# Altium PCB master-schematic-gs.PcbDoc
Units mil, origin at the board's own origin, x right, y up, seen from the top; angles counter-clockwise.
Board outline 5050 x 4775 mil, 2 copper layers (Top Layer, Bottom Layer); 27 components, 82 nets, 268 pads, 13 vias.
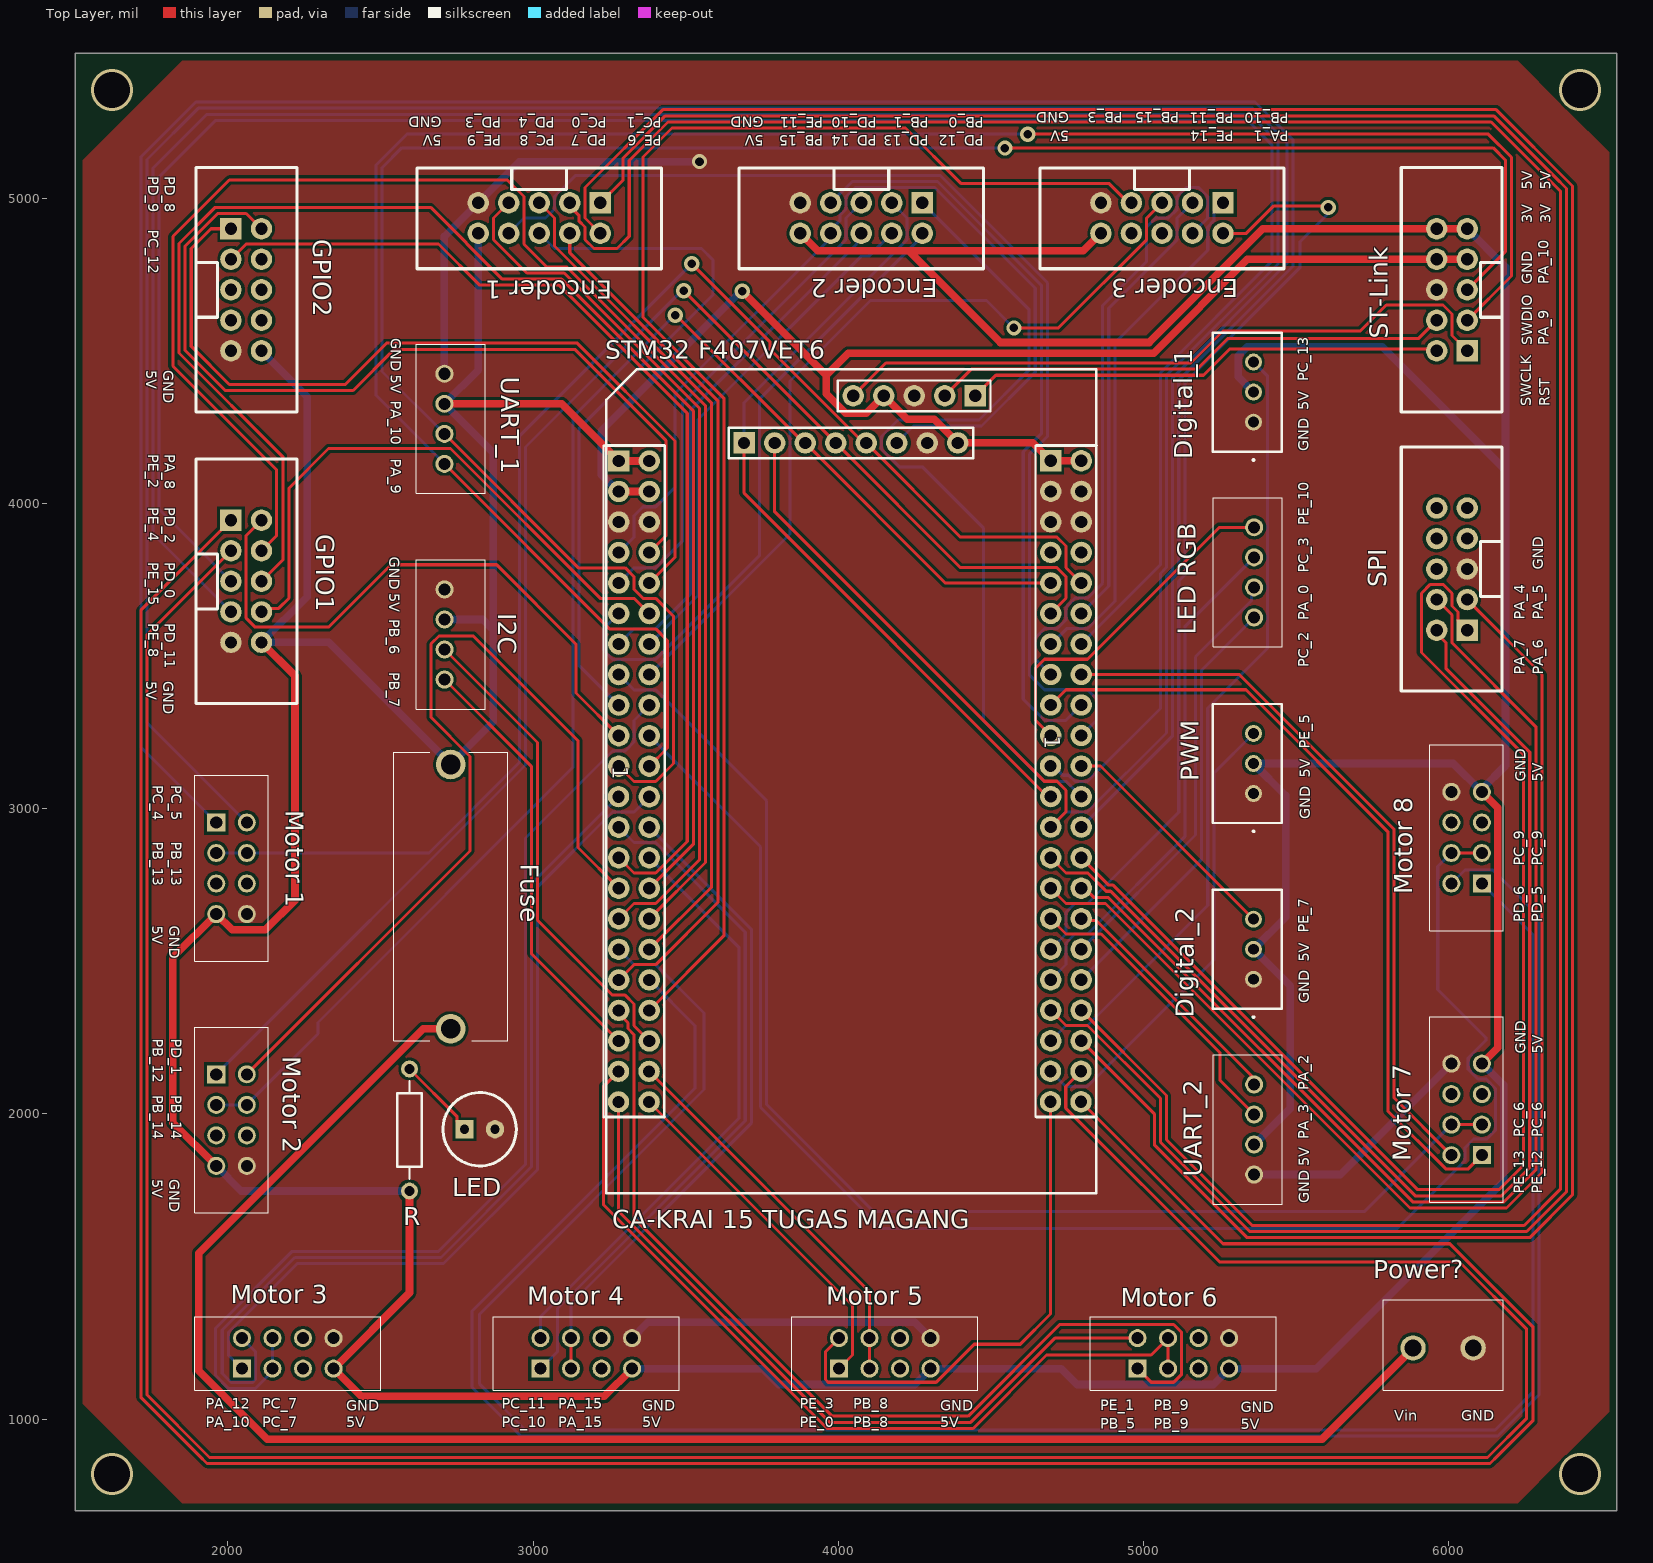
[diagram p0: Top Layer view]
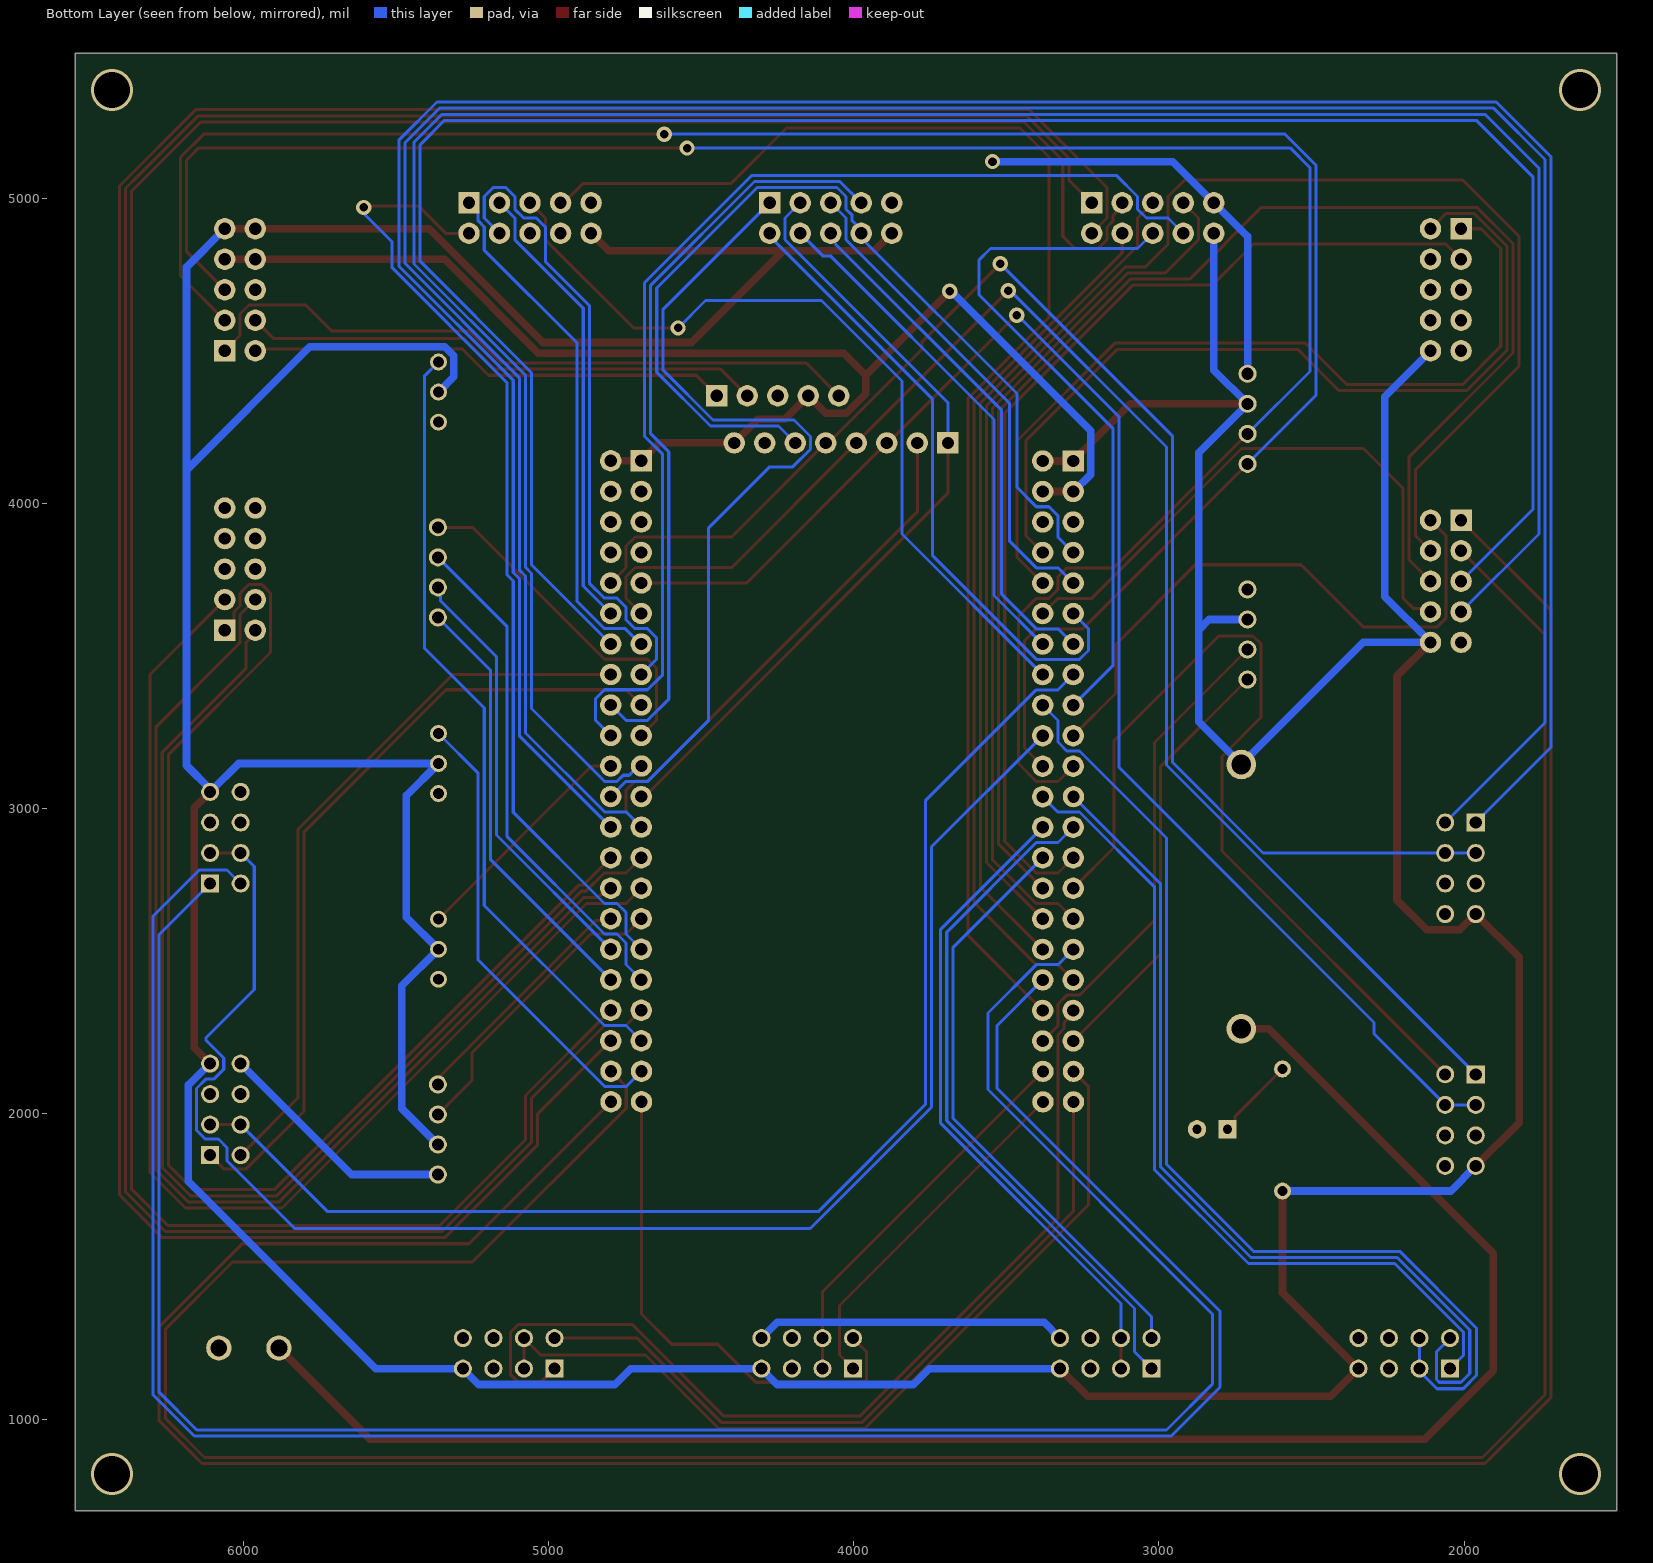
[diagram p1: Bottom Layer view, seen from below]

## Layer stack, top to bottom
Top Solder: solder mask 0.4, Solder Resist, Dk 3.5
Top Layer: signal copper 1.4
Dielectric 1: dielectric 12.6, FR-4, Dk 4.8
Bottom Layer: signal copper 1.4
Bottom Solder: solder mask 0.4, Solder Resist, Dk 3.5

## Board outline
1500,700 6550,700 6550,5475 1500,5475

## Design rules (kind name [scope] priority, off if disabled: settings)
Clearance [All] p1: gap=10 ignorepadtopadclearanceinfootprint=FALSE except(0: Arc-Hole Track-Hole SMDPad-Hole THPad-Hole Via-Hole Fill-Hole Poly-Hole Region-Hole Text-Hole)
PolygonConnect [All] p1: connectstyle=Direct reliefconductorwidth=10 reliefentries=4 polygonreliefangle="90 Angle" airgapwidth=10
RoutingVias [All] p1: holewidth=28 width=50 viastyle="Through Hole" minholewidth=28 minwidth=50 maxholewidth=28 maxwidth=50
SolderMaskExpansion [All] p1: expansion=4 istentingtop=FALSE
Width Width_2 [InNet('3V')] p1: maxlimit=30 minlimit=20 preferedwidth=25 minimp=50.000000 maximp=50.000000 favimp=50.000000
Width Width_3 [InNet('Fuse')] p2: maxlimit=30 minlimit=20 preferedwidth=25 minimp=50.000000 maximp=50.000000 favimp=50.000000
Width Width_1 [InNet('GND')] p3: maxlimit=30 minlimit=20 preferedwidth=25 minimp=50.000000 maximp=50.000000 favimp=50.000000
Width [InNet('5V')] p4: maxlimit=30 minlimit=20 preferedwidth=25 minimp=50.000000 maximp=50.000000 favimp=50.000000
30 further rules are at their usual default settings.

## Components (designator, comment, footprint, x,y, rotation, side; value= is the part's Value field where it differs from the comment)
Digital_1 "B3B-XH-A_LF__SN_" B3BXHALFSN 5360,4266.57 r90 top (schematic designator Interrupt)
Digital_2 "B3B-XH-A_LF__SN_" B3BXHALFSN 5360,2441.45 r90 top (schematic designator Infrared)
"Encoder 1" "Header ISP" "Header ISP" 3120,5085 r180 top
"Encoder 2" "Header ISP" "Header ISP" 4175,5085 r180 top
"Encoder 3" "Header ISP" "Header ISP" 5160,5085 r180 top
Fuse "C3131" C3131 2730,3145 r270 top (schematic designator Fuse?)
GPIO1 "Header ISP" "Header ISP" 1910,3845 r270 top (schematic designator "Digital 1")
GPIO2 "Header ISP" "Header ISP" 1910,4800.07 r270 top (schematic designator "Digital 2")
I2C "B4B-XH-A_LF__SN_" B4BXHALFSN 2710,3718.43 r270 top
LED "LED 5mm" "LED 5mm" 2825,1950 r0 top (schematic designator led?)
"LED RGB" "B4B-XH-A_LF__SN_" B4BXHALFSN 5361.97,3626.7 r90 top
"Motor 1" "09181089622" 09181089622 1961.98,2955 r270 top
"Motor 2" "09181089622" 09181089622 1961.98,2130 r270 top
"Motor 3" "09181089622" 09181089622 2046.23,1165.75 r0 top
"Motor 4" "09181089622" 09181089622 3024.15,1165.75 r0 top
"Motor 5" "09181089622" 09181089622 4002.08,1165.75 r0 top
"Motor 6" "09181089622" 09181089622 4980,1165.75 r0 top
"Motor 7" "09181089622" 09181089622 6108.02,1865 r90 top
"Motor 8" "09181089622" 09181089622 6108.02,2755 r90 top
Power? "KF301-2P" KF3012P 5882.82,1233.46 r0 top
PWM "B3B-XH-A_LF__SN_" B3BXHALFSN 5360,3049.82 r90 top (schematic designator Servo)
R "Resistor 0.25W" "Resistor 0.25W" 2595,1947.53 r90 top (schematic designator R?)
SPI "Header ISP" "Header ISP" 6160,3685 r90 top
ST-Link "Header ISP" "Header ISP" 6160,4600.07 r90 top
"STM32 F407VET6" "STM32F407VET6" MICON 4040,3090 r0 top (schematic designator *)
UART_1 "B4B-XH-A_LF__SN_" B4BXHALFSN 2709.49,4425 r270 top
UART_2 "B4B-XH-A_LF__SN_" B4BXHALFSN 5361.97,1801.57 r90 top

## Footprints (in the part's own frame and the unit in brackets; to place one, negate y for a bottom-side part, rotate by r counter-clockwise, add the part's x,y. Pads: shape width x height; smd on the part's side, far side on the other; paste and mask are expansions set on the pad)
09181089622 [mm]
  rect 1.5x1.5 hole 1: 1(0,0)
  round 1.5 hole 1: 2(0,2.54) 3(2.54,0) 4(2.54,2.54) 5(5.08,0) 6(5.08,2.54) 7(7.62,0) 8(7.62,2.54)
  silkscreen extent -3.92,-1.78 11.54,4.32, body extent -3.92,-1.73 11.54,4.27, height 5.25
B3BXHALFSN [mm]
  round 1.4 hole 0.9: 1(0,0) 2(2.5,0) 3(5,0)
  silkscreen extent -3.2,-2.35 7.45,3.4, body extent -2.45,-2.35 7.45,3.4, height 7.09
B4BXHALFSN [mm]
  round 1.5 hole 1: 1(0,0) 2(2.5,0) 3(5,0) 4(7.5,0)
  silkscreen extent -2.45,-2.35 9.95,3.4, body extent -2.45,-2.35 9.95,3.4, height 7.52
C3131 [mm]
  round 2.46 hole 1.64: 1(0,0) 2(22,0)
  silkscreen extent -1,-4.75 23,4.75, body extent -1,-4.75 23,4.75, height 10.6
"Header ISP" [mil]
  rect 70x70 hole 40: 1(-100,100)
  round 70 hole 40: 2(-100,200) 3(0,100) 4(0,200) 5(100,100) 6(100,200) 7(200,100) 8(200,200) 9(300,100) 10(300,200)
  silkscreen extent -300,-14 500,316, body extent -300,-20 501,334, height 365
KF3012P [mm]
  round 2.1 hole 1.4: 1(0,0) 2(5,0)
  silkscreen extent -2.5,-3.5 7.5,4, body extent -2.99,-3.35 7.51,4.15, height 10
"LED 5mm" [mil]
  rect 60x60 hole 30: 1(-50,0)
  round 60 hole 30: 2(50,0)
  silkscreen extent -120,-120 120,120, body extent -117,-118 96,118, height 268
MICON [mil] "STM32F407VET6"
  round 70 hole 40: 3V3(-759.34,949.33) 3V3(-659.34,949.33) 3V3(108.46,1262.79) 3V3(351.3,1108.52) 3V3(755.69,1049.72) 5V(-659.34,1049.33) BOOT0(8.46,1262.79) GND(-759.34,849.33) GND(-659.34,849.33) GND(208.46,1262.79) GND(251.3,1108.52) GND(655.69,849.72) GND(655.69,949.72) GND(755.69,849.72) GND(755.69,949.72) PA0(755.69,-550.28) PA1(655.69,-550.28) PA2(755.69,-450.28) PA3(655.69,-450.28) PA4(755.69,-350.28) PA5(655.69,-350.28) PA6(755.69,-250.28) PA7(655.69,-250.28) PA8(-759.34,149.33) PA9(-659.34,49.33) PA10(-759.34,49.33) PA11(-659.34,-50.67) PA12(-760.12,-50.39) PA15(-659.34,-150.67) PB0(755.69,-50.28) PB1(655.69,-50.28) PB3(-659.34,-750.67) PB5(-759.34,-750.67) PB6(-659.34,-850.67) PB7(-759.34,-850.67) PB8(-660.12,-950.39) PB9(-760.12,-950.39) PB10(655.69,449.72) PB11(755.69,549.72) PB12(-48.7,1108.52) PB12(655.69,549.72) PB13(51.3,1108.52) PB13(755.69,649.72) PB14(-148.7,1108.52) PB14(655.69,649.72) PB15(-759.33,749.33) PB15(151.3,1108.52) PC0(755.69,-750.28) PC1(655.69,-750.28) PC2(755.69,-650.28) PC3(655.69,-650.28) PC4(755.69,-150.28) PC5(-248.7,1108.52) PC5(655.69,-150.28) PC6(-759.34,349.33) PC7(-659.34,249.33) PC8(-759.34,249.33) PC9(-659.34,149.33) PC10(-759.34,-150.67) PC11(-659.34,-250.67) PC12(-759.34,-250.67) PC13(655.69,-850.28) PD0(-659.34,-350.67) PD1(-759.34,-350.67) PD2(-659.34,-450.67) PD3(-759.34,-450.67) PD4(-659.34,-550.67) PD5(-759.34,-550.67) PD6(-659.34,-650.67) PD7(-759.34,-650.67) PD8(-659.33,749.33) PD9(-659.34,649.33) PD10(-759.34,649.33) PD11(-659.34,549.33) PD12(-759.34,549.33) PD13(-659.34,449.33) PD14(-759.34,449.33) PD15(-659.34,349.33) PE0(-660.12,-1050.39) PE1(-760.12,-1050.39) PE2(754.92,-1050) PE3(654.92,-1050) PE4(754.92,-950) PE5(654.92,-950) PE6(755.69,-850.28) PE7(755.69,49.72) PE8(654.92,50) PE9(755.69,149.72) PE10(655.69,149.72) PE11(755.69,249.72) PE12(655.69,249.72) PE13(755.69,349.72) PE14(655.69,349.72) PE15(755.69,449.72) SWDIO(308.46,1262.79) VDD(655.69,749.72) VREF(755.69,749.72)
  rect 70x70 hole 40: 3V3(655.69,1049.72) 5V(-759.34,1049.33) PB1(-348.7,1108.52) SWCLK(408.46,1262.79)
  silkscreen extent -809,-1350 806,1350, body extent -810,-1100 806,1313, height 327
"Resistor 0.25W" [mm]
  round 1.4 hole 0.85: 1(-5.08,0) 2(5.08,0)
  silkscreen extent -4.06,-1.02 4.06,1.02, body extent -5.35,-1.27 5.35,1.33, height 2.7

## Part data
Digital_1 Digital_2: "Connector", Arrow Part Number=B3B-XH-A(LF)(SN), Manufacturer_Name="JST (JAPAN SOLDERLESS TERMINALS)", Arrow Price/Stock=https://www.arrow.com/en/products/b3b-xh-a-lf-sn/jst-manufacturing?region=europe, Datasheet Link=https://datasheet.lcsc.com/szlcsc/1812131720_JST-Sales-America-B3B-XH-A-LF-SN_C144394.pdf, Height=7mm, Manufacturer_Part_Number=B3B-XH-A(LF)(SN)
"Encoder 1" "Encoder 3" GPIO1 GPIO2: "Encoder Posisi X"
"Encoder 2": "Encoder Posisi Y"
Fuse: "Undefined or Miscellaneous", Manufacturer_Name="Xucheng Elec", Datasheet Link=https://datasheet.lcsc.com/szlcsc/XC-Elec-Shenzhen-5x20-BLX-Fuse-holder_C3131.pdf, Height=10.5mm, Manufacturer_Part_Number=C3131
I2C: "TF Mini", Manufacturer_Name="JST (JAPAN SOLDERLESS TERMINALS)", Manufacturer_Part_Number=B4B-XH-A(LF)(SN), Datasheet Link=http://uk.rs-online.com/web/p/products/8201551, Height=7mm
"LED RGB": "Led Strip", Manufacturer_Name="JST (JAPAN SOLDERLESS TERMINALS)", Manufacturer_Part_Number=B4B-XH-A(LF)(SN), Datasheet Link=http://uk.rs-online.com/web/p/products/8201551, Height=7mm
"Motor 1" "Motor 2" "Motor 3" "Motor 4" "Motor 5" "Motor 6" "Motor 7" "Motor 8": "Connector", Manufacturer_Name=HARTING, Mouser Part Number=617-09181089622, Datasheet Link=http://uk.rs-online.com/web/p/products/6935182, Height=5.5mm, Manufacturer_Part_Number=09181089622, Mouser Price/Stock=https://www.mouser.co.uk/ProductDetail/HARTING/09181089622?qs=FeiuqfHlVTv2CjJEejdN9Q%3D%3D
Power?: "Connector", Manufacturer_Name="Handson Technology", Datasheet Link=http://www.handsontec.com/dataspecs/terminal%20block-5mm.pdf, Height=10mm, Manufacturer_Part_Number=KF301-2P
PWM: "Servo pin", Arrow Part Number=B3B-XH-A(LF)(SN), Manufacturer_Name="JST (JAPAN SOLDERLESS TERMINALS)", Arrow Price/Stock=https://www.arrow.com/en/products/b3b-xh-a-lf-sn/jst-manufacturing?region=europe, Datasheet Link=https://datasheet.lcsc.com/szlcsc/1812131720_JST-Sales-America-B3B-XH-A-LF-SN_C144394.pdf, Height=7mm, Manufacturer_Part_Number=B3B-XH-A(LF)(SN)
ST-Link: "ST-Link Port"
"STM32 F407VET6": library part Micon?
UART_1 UART_2: "ESP32", Manufacturer_Name="JST (JAPAN SOLDERLESS TERMINALS)", Manufacturer_Part_Number=B4B-XH-A(LF)(SN), Datasheet Link=http://uk.rs-online.com/web/p/products/8201551, Height=7mm

## Via types
v1: diameter 50, hole 28, Top Layer to Bottom Layer, 9 vias
v2: diameter 137.79, hole 118.11, Top Layer to Bottom Layer, 4 vias

## Nets (pads, with @x,y where several pads share a name; then routed paths per layer and width w, separated by ;. In a path a pad name is that pad's centre, name@x,y a point inside that pad or via, vN(x,y) a via of type N, cw(c..) or ccw(c..) an arc to the next point about the centre after c; other vN are vias at no path point)
3V: "STM32 F407VET6.3V3" ST-Link.7 ST-Link.8 | length 4643.7
  Top Layer w25: 3280.66,4039.33 3380.66,4039.33 ; v1(3685,4695) 3960,4420 ; 4795.69,4139.72 4695.69,4139.72 4636.89,4198.52 4391.3,4198.52 4314.17,4275.66 4225.59,4275.66 4148.46,4352.79 4090.96,4295.29 4024.64,4295.29 3960,4359.93 3960,4420 ; ST-Link.7 ST-Link.8 5340.07,4800.07 5032.5,4492.5 4032.5,4492.5 3960,4420
  Bottom Layer w25: 3280.66,4039.33 3278.84,4039.33 3223.16,4095.01 3223.16,4238.16 v1@3675,4690
5V: "Encoder 1.10" "Encoder 2.10" "Encoder 3.10" "Motor 1.7" "Motor 2.7" "Motor 3.7" "Motor 4.7" "Motor 5.7" "Motor 6.7" "Motor 7.7" "Motor 8.7" "STM32 F407VET6.5V" Digital_1.2 Digital_2.2 Fuse.1 GPIO1.10 GPIO2.10 I2C.2 PWM.2 R.1 ST-Link.9 ST-Link.10 UART_1.2 UART_2.2 | length 22287.8
  Top Layer w25: 1961.98,1830 1820,1971.98 1820,2513.02 1961.98,2655 2014.01,2602.97 2122.97,2602.97 2220,2700 2220,3435 GPIO1.10 ; R.1 2595,1414.52 2346.23,1165.75 2436.98,1075 3233.41,1075 3324.15,1165.75 ; UART_1.2 3093.41,4326.57 3280.66,4139.33 3380.66,4139.33 ; 3875,4885 3932.5,4827.5 4230,4827.5 ; 4860,4885 4802.5,4827.5 4230,4827.5 ; ST-Link.9 ST-Link.10 5390.57,4900.07 5018,4527.5 4530,4527.5 4230,4827.5 ; 6108.02,2165 6160.05,2217.03 6160.05,3002.97 6108.02,3055
  Bottom Layer w25: 1961.98,1830 2044.45,1747.53 R.1 ; GPIO2.10 2260,4350.07 2260,3695 GPIO1.10 2330,3545 Fuse.1 2870,3285 2870,3585 ; I2C.2 2835,3620 2870,3585 ; 2820,4885 2820,4437.09 UART_1.2 2870,4166.06 2870,3585 ; 3324.15,1165.75 3752.48,1165.75 3804.51,1113.72 4250.05,1113.72 4302.08,1165.75 4730.41,1165.75 4782.44,1113.72 5227.97,1113.72 5280,1165.75 5565.75,1165.75 6180.05,1780.05 6180.05,2094.83 6109.88,2165 6108.02,2165 ; Digital_1.2 5309.94,4415.06 5309.94,4484.16 5339.26,4513.48 5781.52,4513.48 6185.49,4109.51 ; UART_2.2 5480,2018.03 5480,2419.87 Digital_2.2 5465,2644.87 5465,3043.25 PWM.2 6014.77,3148.25 6108.02,3055 6108.02,3064.22 6185.49,3141.68 6185.49,4109.51 ; ST-Link.9 6185.49,4774.58 6185.49,4109.51
Fuse: Fuse.2 Power?.1 | length 5708.8
  Top Layer w25: Fuse.2 2639.71,2278.86 1905,1544.15 1905,1158.89 2128.89,935 5584.36,935 Power?.1
GND: "Encoder 1.9" "Encoder 2.9" "Encoder 3.9" "Motor 1.8" "Motor 2.8" "Motor 3.8" "Motor 4.8" "Motor 5.8" "Motor 6.8" "Motor 7.8" "Motor 8.8" "STM32 F407VET6.GND" Digital_1.1 Digital_2.1 GPIO1.9 GPIO2.9 I2C.1 LED.2 Power?.2 PWM.1 SPI.5 ST-Link.6 UART_1.1 UART_2.1 | length 3204.3
  Bottom Layer w25: UART_1.1 2709.49,4874.49 2955,5120 v1(3545,5120) ; 3324.15,1265.75 3376.18,1317.78 4250.05,1317.78 4302.08,1265.75 ; UART_2.1 5644.6,1801.57 6008.02,2165
Netled?_1: LED.1 R.2 | length 272.1
  Top Layer w10: R.2 2750,1992.53 2750,1975 LED.1
PA_0: "LED RGB.2" "STM32 F407VET6.PA0" | length 1420
  Bottom Layer w10: 4795.69,2539.72 5170,2914.03 5170,3497.71 5352.89,3680.6 5352.89,3716.05 5361.97,3725.13
PA_1: "Encoder 3.2" "STM32 F407VET6.PA1" | length 3185.5
  Top Layer w10: 5260,4885 5336.61,4885 5426.61,4975 v1@5590,4975
  Bottom Layer w10: 4695.69,2539.72 4745.69,2589.72 4745.69,2660.43 4774.98,2689.72 4816.4,2689.72 5115,2988.32 5115,3745.89 5135,3765.89 5135,4394.92 5511.89,4771.81 5511.89,4856.89 v1@5610,4955
  other v1: 5605,4970
PA_2: "STM32 F407VET6.PA2" UART_2.4 | length 802.9
  Top Layer w10: 4795.69,2639.72 4802.26,2633.15 4845.69,2633.15 5352.58,2126.26 5352.58,2106.24 UART_2.4
PA_3: "STM32 F407VET6.PA3" UART_2.3 | length 984.7
  Top Layer w10: 4695.69,2639.72 4745.69,2589.72 4860.84,2589.72 5250,2200.56 5250,2110.39 UART_2.3
PA_4: "STM32 F407VET6.PA4" SPI.4 | length 3961.3
  Top Layer w10: 4795.69,2739.72 4806.4,2739.72 4836.4,2709.72 4883.56,2709.72 5881.21,1712.07 6180.5,1712.07 6285,1816.57 6285,3268.79 6010,3543.79 6010,3635 SPI.4
PA_5: "STM32 F407VET6.PA5" SPI.3 | length 4069.6
  Top Layer w10: 4695.69,2739.72 4745.69,2689.72 4875.28,2689.72 5872.93,1692.07 6188.79,1692.07 6305,1808.28 6305,3440 SPI.3
PA_6: "STM32 F407VET6.PA6" SPI.1 | length 4210.4
  Top Layer w10: 4795.69,2839.72 4885.69,2749.72 4900.13,2749.72 5897.78,1752.07 6163.93,1752.07 6245,1833.14 6245,3176.72 5910,3511.72 5910,3705.71 5939.29,3735 5980.71,3735 6010,3705.71 6010,3664.29 6030,3644.29 6030,3615 SPI.1
PA_7: "STM32 F407VET6.PA7" SPI.2 | length 3953
  Top Layer w10: 4695.69,2839.72 4745.69,2789.72 4817.41,2789.72 4877.41,2729.72 4891.85,2729.72 5889.5,1732.07 6172.22,1732.07 6265,1824.85 6265,3185 5990,3460 5990,3544.29 5960,3574.29 SPI.2
PA_8: "STM32 F407VET6.PA8" GPIO1.2 | length 1984.5
  Top Layer w10: GPIO1.2 2060,3895 2060,3624.29 2089.29,3595 2330,3595 2534.33,3799.33 2880.67,3799.33 3140.66,3539.34 3140.66,3379.33 3280.66,3239.33
PA_9: "STM32 F407VET6.PA9" ST-Link.3 UART_1.4 | length 6865.5
  Top Layer w10: UART_1.4 3249.88,3589.33 3401.37,3589.33 3440,3550.7 3440,3198.67 3380.66,3139.33 ; v1(4620,5210) 6129.14,5210 6205,5134.14 6205,4745.07 ST-Link.3
  Bottom Layer w10: UART_1.4 2485,4354.21 2485,5108.28 2586.72,5210 v1(4620,5210)
PA_10: "STM32 F407VET6.PA10" ST-Link.5 UART_1.3 | length 6886.7
  Top Layer w10: UART_1.3 3148.31,3789.33 3301.37,3789.33 3330.66,3760.04 3330.66,3718.62 3359.95,3689.33 3401.37,3689.33 3460,3630.7 3460,3147.96 3401.37,3089.33 3330.66,3089.33 3280.66,3139.33 ; v1(4545.61,5164.27) 4546.34,5165 6145,5165 6185,5125 6185,4825.07 ST-Link.5
  Bottom Layer w10: UART_1.3 2505,4432.64 2505,5100 2570,5165 4544.88,5165 v1(4545.61,5164.27)
PA_11: "Motor 3.1" "STM32 F407VET6.PA11" | length 2785.3
  Bottom Layer w10: 2046.23,1165.75 2001.7,1210.28 2001.7,1284.19 2227.51,1510 2638.28,1510 2706.57,1510 3015,1818.43 3015,2744.38 3260.22,2989.61 3330.93,2989.61 3380.66,3039.33
PA_12: "Motor 3.2" "STM32 F407VET6.PA12" | length 2986.8
  Bottom Layer w10: 2046.23,1265.75 2090.76,1221.22 2090.76,1130.01 2081.97,1121.22 2010.49,1121.22 1981.7,1150.01 1981.7,1292.48 2219.23,1530 2630,1530 2698.28,1530 2995,1826.72 2995,2754.72 3279.88,3039.61
PA_15: "Motor 4.3" "Motor 4.4" "STM32 F407VET6.PA15" | length 2156.8
  Top Layer w10: 3124.15,1165.75 3124.15,1265.75
  Bottom Layer w10: 3124.15,1265.75 3124.15,1379.15 3715,1970 3715,2604.99 3380.66,2939.33
PB_0: "Encoder 2.1" "STM32 F407VET6.PB0" | length 2803
  Bottom Layer w10: 4275,4985 4625,4635 4625,4438.12 4460.48,4273.59 4195.66,4273.59 4141.3,4219.23 4141.3,4177.81 4199.11,4120 4275,4120 4474.74,3920.26 4474.74,3289.46 4674.48,3089.72 4745.69,3089.72 4795.69,3039.72
PB_1: "Encoder 2.3" "STM32 F407VET6.PB1" | length 2609.2
  Top Layer w10: 3691.3,4198.52 3691.3,4033.7 4685.28,3039.72 4695.69,3039.72
  Bottom Layer w10: 3691.3,4198.52 3691.3,4330.59 4225,4864.29 4225,4935 4175,4985
PB_3: "Encoder 3.7" "STM32 F407VET6.PB3" | length 4747.5
  Top Layer w10: 3380.66,2339.33 3625,2583.67 3625,4345 3360,4610 3360,5135 3455,5230 4220,5230 4401.25,5048.75 4886.25,5048.75 4950,4985 4960,4985
PB_5: "Motor 6.1" "STM32 F407VET6.PB5" | length 3210
  Top Layer w10: 3280.66,2339.33 3280.66,2328.62 3310.66,2298.62 3310.66,2280.04 3330.66,2260.04 3330.66,2161.09 3329.88,2160.32 3329.88,1660.12 3980,1010 4425,1010 4725.28,1310.28 5098.44,1310.28 5124.53,1284.19 5124.53,1147.3 5098.44,1121.22 5024.53,1121.22 4980,1165.75
PB_6: "STM32 F407VET6.PB6" I2C.3 | length 1584.3
  Top Layer w10: I2C.3 3014.28,3217.29 3014.28,2634.99 3259.95,2389.33 3301.37,2389.33 3330.66,2360.04 3330.66,2289.33 3380.66,2239.33
PB_7: "STM32 F407VET6.PB7" I2C.4 | length 1420.2
  Top Layer w10: I2C.4 2994.28,3138.87 2994.28,2525.7 3280.66,2239.33
PB_8: "Motor 5.3" "Motor 5.4" "STM32 F407VET6.PB8" | length 1273
  Top Layer w10: 3379.88,2139.61 4102.08,1417.41 4102.08,1265.75 4102.08,1165.75
PB_9: "Motor 6.3" "Motor 6.4" "STM32 F407VET6.PB9" | length 2833.2
  Top Layer w10: 3279.88,2139.61 3229.88,2089.61 3229.88,1703.55 3963.43,970 4441.57,970 4681.84,1210.28 5024.53,1210.28 5080,1265.75 5080,1165.75
PB_10: "Encoder 3.1" "STM32 F407VET6.PB10" | length 1720.4
  Bottom Layer w10: 4695.69,3539.72 4698.01,3539.72 4748.01,3589.72 4816.4,3589.72 4905.69,3679.01 4905.69,4525.69 5210,4830 5210,4905.71 5230,4925.71 5230,4955 5260,4985
PB_11: "Encoder 3.3" "STM32 F407VET6.PB11" | length 1496.2
  Bottom Layer w10: 4795.69,3639.72 4885.69,3729.72 4885.69,4639.98 5110,4864.29 5110,4935 5160,4985
PB_12: "Motor 2.1" "STM32 F407VET6.PB12" | length 4986.6
  Top Layer w10: v1(3493.28,4696.72) 3748.94,4441.06 3748.94,4440.88 3991.3,4198.52 4400.1,3789.72 4716.4,3789.72 4745.69,3760.43 4745.69,3689.72 4695.69,3639.72
  Bottom Layer w10: 1961.98,2130 2975,3143.02 2975,4185 3486.72,4696.72 v1(3493.28,4696.72)
PB_13: "Motor 1.3" "Motor 1.4" "STM32 F407VET6.PB13" | length 4747.6
  Top Layer w10: v1(3520,4785) 3776.5,4528.5 3776.5,4504.54 4013.25,4267.79 4082.52,4198.52 4091.3,4198.52 4400.1,3889.72 4716.4,3889.72 4745.69,3860.43 4745.69,3789.72 4795.69,3739.72
  Bottom Layer w10: 1961.98,2855 2061.98,2855 2658.69,2855 2955,3151.31 2955,4220 v1(3520,4785)
PB_14: "Motor 2.3" "Motor 2.4" "STM32 F407VET6.PB14" | length 4862.8
  Top Layer w10: v1(3465.74,4616.72) 3468.2,4616.72 3886.39,4198.52 3891.3,4198.52 4350.1,3739.72 4695.69,3739.72
  Bottom Layer w10: 1961.98,2030 2061.98,2030 2295,2263.02 2295,2300 3130,3135 3130,4283.43 3463.28,4616.72 v1(3465.74,4616.72)
PB_15: "Encoder 2.8" "STM32 F407VET6.PB15" | length 3093.2
  Bottom Layer w10: 3280.67,3839.33 3330.66,3889.32 3330.66,3960.04 3359.95,3989.33 3401.37,3989.33 3465,4052.96 3465,4360 3975,4870 3975,4895.71 4005,4925.71 4005,4944.29 4025,4964.29 4025,5005.71 4054.29,5035 4316.21,5035 4645,4706.21 4645,4429.83 4468.76,4253.59 4246.37,4253.59 4191.3,4198.52
PC_0: "Encoder 1.3" "STM32 F407VET6.PC0" | length 9024.9
  Top Layer w10: 3120,4985 3120,4974.29 3150,4944.29 3150,4925.71 3170,4905.71 3170,4864.29 3199.29,4835 3275,4835 3315,4875 3315,5123.43 3441.57,5250 6138.43,5250 6365,5023.43 6365,1753.28 6246.72,1635 5355.86,1635 5075,1915.86 5075,2060.41 4795.69,2339.72
PC_1: "Encoder 1.1" "STM32 F407VET6.PC1" | length 8837.9
  Top Layer w10: 3220,4985 3295,5060 3295,5131.72 3433.28,5270 6146.72,5270 6345,5071.72 6385,5031.72 6385,1745 6345,1705 6292.07,1652.07 6255,1615 5347.57,1615 5310.5,1652.07 5055,1907.57 5055,2051.12 4816.4,2289.72 4745.69,2289.72 4695.69,2339.72
PC_2: "LED RGB.1" "STM32 F407VET6.PC2" | length 1421.5
  Bottom Layer w10: 4795.69,2439.72 5190,2834.03 5190,3454.73 5361.97,3626.7
PC_3: "LED RGB.3" "STM32 F407VET6.PC3" | length 1684.1
  Bottom Layer w10: 4695.69,2439.72 4745.69,2489.72 4745.69,2560.43 4774.98,2589.72 4816.4,2589.72 5135,2908.32 5135,3596.58 5361.97,3823.55
PC_4: "Motor 1.1" "STM32 F407VET6.PC4" | length 8721.4
  Bottom Layer w10: 1961.98,2955 1715,3201.98 1715,5135 1895,5315 5364.85,5315 5490,5189.85 5490,4778.21 5115,4403.21 5115,3774.18 5095,3754.18 5095,3239.03 4795.69,2939.72
PC_5: "Motor 1.2" "STM32 F407VET6.PC5" | length 10462.2
  Top Layer w10: 3791.3,4198.52 3791.3,3972.9 4674.21,3090 4716.12,3090 4745.69,3060.43 4745.69,2989.72 4695.69,2939.72
  Bottom Layer w10: 2061.98,2955 1735,3281.98 1735,5126.72 1903.28,5295 5356.57,5295 5470,5181.57 5470,4786.49 5095,4411.49 5095,3782.46 5075,3762.46 5075,3248.32 4816.4,2989.72 4745.69,2989.72 4695.69,2939.72
PC_6: "Motor 7.3" "Motor 7.4" "STM32 F407VET6.PC6" | length 4256.9
  Top Layer w10: 6008.02,1965 6108.02,1965
  Bottom Layer w10: 3280.66,3439.33 3330.66,3389.33 3401.37,3389.33 3765,3025.7 3765,2030.86 4115.86,1680 5723.02,1680 6008.02,1965
PC_7: "Motor 3.3" "Motor 3.4" "STM32 F407VET6.PC7" | length 3425.7
  Bottom Layer w10: 2146.23,1265.75 2146.23,1157.2 2089.03,1100 2003.43,1100 1960,1143.43 1960,1299.06 2210.94,1550 2690,1550 2975,1835 2975,2904.38 3259.95,3189.33 3301.37,3189.33 3330.66,3218.62 3330.66,3289.33 3380.66,3339.33
PC_8: "Encoder 1.6" "STM32 F407VET6.PC8" | length 2300.2
  Bottom Layer w10: 3020,4885 3070,4835 3551.57,4835 3590,4796.57 3590,4684.41 3150,4244.41 3150,3469.99 3280.66,3339.33
PC_9: "Motor 8.3" "Motor 8.4" "STM32 F407VET6.PC9" | length 5266.9
  Top Layer w10: 6008.02,2855 6108.02,2855
  Bottom Layer w10: 3380.66,3239.33 3745,2874.99 3745,2022.57 4142.57,1625 5830.99,1625 6052.55,1846.56 6052.55,1889.8 6080.93,1918.18 6124.17,1918.18 6152.55,1946.56 6152.55,2083.44 6120.99,2115 6095.05,2115 6063.49,2146.56 6063.49,2183.44 6121.51,2241.46 6121.51,2249.74 5963.49,2407.76 5963.49,2810.47 6008.02,2855
PC_10: "Motor 4.1" "STM32 F407VET6.PC10" | length 2264.5
  Bottom Layer w10: 3024.15,1165.75 3079.63,1221.22 3079.63,1362.91 3695,1978.28 3695,2595.7 3401.37,2889.33 3330.66,2889.33 3280.66,2939.33
PC_11: "Motor 4.2" "STM32 F407VET6.PC11" | length 1965.1
  Bottom Layer w10: 3024.15,1265.75 3024.15,1335.72 3675,1986.57 3675,2544.99 3380.66,2839.33
PC_12: "STM32 F407VET6.PC12" GPIO2.3 | length 3435.8
  Top Layer w10: GPIO2.3 2060,4850.07 2689.93,4850.07 2825,4715 3085.29,4715 3505,4295.29 3505,2892.96 3401.37,2789.33 3330.66,2789.33 3280.66,2839.33
PC_13: "STM32 F407VET6.PC13" Digital_1.3 | length 2578.8
  Bottom Layer w10: 4695.69,2239.72 4745.69,2289.72 4816.4,2289.72 5210,2683.32 5210,3330 5406.5,3526.5 5406.5,4416.93 Digital_1.3
PD_0: "STM32 F407VET6.PD0" GPIO1.6 | length 4910.6
  Top Layer w10: GPIO1.6 2180,3815 2180,4153.14 1840,4493.14 1840,4851.57 1958.5,4970.07 2664.22,4970.07 2899.29,4735 3093.58,4735 3525,4303.58 3525,2883.67 3380.66,2739.33
PD_1: "Motor 2.2" "STM32 F407VET6.PD1" | length 2939.5
  Top Layer w10: 2061.98,2130 2793.43,2861.45 2793.43,3171.27 2665.47,3299.22 2665.47,3540.02 2691.56,3566.1 2803.9,3566.1 3147.09,3222.91 3147.09,2872.9 3280.66,2739.33
PD_2: "STM32 F407VET6.PD2" GPIO1.4 | length 5168.2
  Top Layer w10: GPIO1.4 2160,3895 2160,4110 1820,4450 1820,4875 2005,5060 2915.71,5060 2970,5005.71 2970,4849.66 3044.66,4775 3110.15,4775 3565,4320.15 3565,2823.67 3380.66,2639.33
PD_3: "Encoder 1.7" "STM32 F407VET6.PD3" | length 2868.7
  Top Layer w10: 2920,4985 2870,4935 2870,4864.29 2979.29,4755 3101.86,4755 3545,4311.86 3545,2832.96 3401.37,2689.33 3330.66,2689.33 3280.66,2639.33
PD_4: "Encoder 1.5" "STM32 F407VET6.PD4" | length 2764.3
  Top Layer w10: 3020,4985 3070,4935 3070,4843.43 3585,4328.43 3585,2743.67 3380.66,2539.33
PD_5: "Motor 8.1" "STM32 F407VET6.PD5" | length 7185
  Bottom Layer w10: 3280.66,2539.33 3330.66,2489.33 3401.37,2489.33 3560,2330.7 3560,2080 2825,1345 2825,1115 2975,965 6151.72,965 6275,1088.28 6275,2588.02 6108.02,2755
PD_6: "Motor 8.2" "STM32 F407VET6.PD6" | length 7252.1
  Bottom Layer w10: 3380.66,2439.33 3530,2289.99 3530,2083.72 2800,1353.72 2800,1105 2960,945 6160,945 6295,1080 6295,2648.29 6143.76,2799.53 6052.55,2799.53 6008.02,2755
PD_7: "Encoder 1.4" "STM32 F407VET6.PD7" | length 2822.3
  Top Layer w10: 3120,4885 3120,4821.72 3605,4336.72 3605,2692.96 3401.37,2489.33 3330.66,2489.33 3280.66,2439.33
PD_8: "STM32 F407VET6.PD8" GPIO2.2 | length 2855.6
  Top Layer w10: GPIO2.2 2060,4950.07 1966.78,4950.07 1860,4843.28 1860,4501.43 1991.43,4370 2410.47,4370 2545.47,4505 3136.72,4505 3435,4206.72 3435,3893.66 3380.67,3839.33
PD_9: "STM32 F407VET6.PD9" GPIO2.1 | length 2802.8
  Top Layer w10: GPIO2.1 1945.07,4900.07 1880,4835 1880,4515 2005,4390 2385,4390 2520,4525 3145,4525 3465,4205 3465,3823.67 3380.66,3739.33
PD_10: "Encoder 2.5" "STM32 F407VET6.PD10" | length 1616.1
  Bottom Layer w10: 3280.66,3739.33 3330.66,3789.33 3401.38,3789.33 3490,3877.95 3490,4329.29 4025,4864.29 4025,4935 4075,4985
PD_11: "STM32 F407VET6.PD11" GPIO1.8 | length 1927.1
  Top Layer w10: GPIO1.8 2121.48,3656.48 2166.48,3656.48 2200,3690 2200,4050 2330,4180 2729.35,4180 3220.02,3689.33 3330.66,3689.33 3380.66,3639.33
PD_12: "Encoder 2.2" "STM32 F407VET6.PD12" | length 2081.8
  Bottom Layer w10: 3280.66,3639.33 3230.66,3589.33 3230.66,3518.62 3259.95,3489.33 3401.37,3489.33 3741.3,3829.26 3741.3,4341.3 4275,4875 4275,4885
PD_13: "Encoder 2.4" "STM32 F407VET6.PD13" | length 1689.3
  Bottom Layer w10: 3380.66,3539.33 3540,3698.67 3540,4275 4075,4810 4100,4810 4175,4885
PD_14: "Encoder 2.6" "STM32 F407VET6.PD14" | length 1716.1
  Bottom Layer w10: 3280.66,3539.33 3330.66,3589.33 3401.37,3589.33 3515,3702.96 3515,4305 4059.64,4849.64 4059.64,4853.41 4075,4868.76 4075,4885
PD_15: "Encoder 3.5" "STM32 F407VET6.PD15" | length 2729.2
  Top Layer w10: v1(4575,4575) 4720.71,4575 5010,4864.29 5010,4935 5060,4985
  Bottom Layer w10: 3380.66,3439.33 3841.3,3899.97 3841.3,4401.3 4105,4665 4485,4665 v1(4575,4575)
PE_0: "Motor 5.1" "STM32 F407VET6.PE0" | length 1168.5
  Top Layer w10: 3379.88,2039.61 4046.6,1372.88 4046.6,1210.28 4002.08,1165.75
PE_1: "Motor 6.2" "STM32 F407VET6.PE1" | length 2458.7
  Top Layer w10: 3279.88,2039.61 3279.88,1681.83 3971.72,990 4433.28,990 4709.03,1265.75 4980,1265.75
PE_2: "STM32 F407VET6.PE2" GPIO1.1 | length 9796.8
  Top Layer w10: GPIO1.1 1715,3650 1715,1071.72 1906.72,880 1931.72,855 6135,855 6160,880 6275,995 6275,1303.28 6003.28,1575 5259.91,1575 4794.92,2040
PE_3: "Motor 5.2" "STM32 F407VET6.PE3" | length 1682.9
  Top Layer w10: 4002.08,1265.75 3957.55,1221.22 3957.55,1130.01 3966.34,1121.22 4320.52,1121.22 4445.05,1245.75 4595.75,1245.75 4694.92,1344.92 4694.92,2040
PE_4: "STM32 F407VET6.PE4" GPIO1.3 | length 9780.2
  Top Layer w10: GPIO1.3 1735,3570 1735,1080 1940,875 6126.72,875 6255,1003.28 6255,1295 6035,1515 5249.2,1515 4744.92,2019.29 4744.92,2090 4794.92,2140
PE_5: "STM32 F407VET6.PE5" PWM.3 | length 1523.6
  Bottom Layer w10: 4694.92,2140 4744.92,2090 4815.63,2090 5230,2504.37 5230,3116.67 PWM.3
PE_6: "Encoder 1.2" "STM32 F407VET6.PE6" | length 8913.5
  Top Layer w10: 3220,4885 3170,4935 3170,5035 3425,5290 6155,5290 6405,5040 6405,1735 6265,1595 5339.29,1595 5035,1899.29 5035,2000.41 4795.69,2239.72
PE_7: "STM32 F407VET6.PE7" Digital_2.3 | length 772
  Top Layer w10: 4795.69,3139.72 4858.58,3139.72 Digital_2.3
PE_8: "STM32 F407VET6.PE8" GPIO1.7 | length 7849.4
  Bottom Layer w10: GPIO1.7 1755,3900 1755,5098.43 1931.57,5275 5348.28,5275 5440,5183.28 5440,4784.77 5075,4419.77 5075,3790.75 5055,3770.75 5055,3328.32 4816.4,3089.72 4774.98,3089.72 4754.98,3109.72 4735.35,3109.72 4705.07,3140 4694.92,3140
PE_9: "Encoder 1.8" "STM32 F407VET6.PE9" | length 3716.2
  Bottom Layer w10: 2920,4885 2970,4935 3040.71,4935 3070,4964.29 3070,5005.71 3139.29,5075 4332.78,5075 4685,4722.78 4685,4220.24 4625.69,4160.93 4625.69,3439.01 4674.98,3389.72 4816.4,3389.72 4845.69,3360.43 4845.69,3289.72 4795.69,3239.72
PE_10: "LED RGB.4" "STM32 F407VET6.PE10" | length 1148.9
  Top Layer w10: 4695.69,3239.72 4645.69,3289.72 4645.69,3460.43 4674.98,3489.72 4816.4,3489.72 5248.66,3921.98 5361.97,3921.98
PE_11: "Encoder 2.7" "STM32 F407VET6.PE11" | length 2479.5
  Bottom Layer w10: 3975,4985 4045,5055 4324.5,5055 4665,4714.5 4665,4228.53 4605.69,4169.22 4605.69,3359.01 4674.98,3289.72 4745.69,3289.72 4795.69,3339.72
PE_12: "Motor 7.1" "STM32 F407VET6.PE12" | length 2637.5
  Top Layer w10: 4695.69,3339.72 4745.69,3389.72 5335.28,3389.72 5800,2925 5800,2010.05 5989.58,1820.47 6063.49,1820.47 6108.02,1865
PE_13: "Motor 7.2" "STM32 F407VET6.PE13" | length 2380.2
  Top Layer w10: 4795.69,3439.72 5313.56,3439.72 5820,2933.28 5820,2053.02 6008.02,1865
PE_14: "Encoder 3.4" "STM32 F407VET6.PE14" | length 2117.5
  Bottom Layer w10: 4695.69,3439.72 4645.69,3489.72 4645.69,3560.43 4674.98,3589.72 4716.4,3589.72 4745.69,3619.01 4745.69,3660.43 4774.98,3689.72 4816.4,3689.72 4865.69,3739.01 4865.69,4648.26 5010,4792.57 5010,4905.71 5039.29,4935 5080.71,4935 5110,4964.29 5110,5005.71 5139.29,5035 5180.71,5035 5210,5005.71 5210,4935 5160,4885
PE_15: "STM32 F407VET6.PE15" GPIO1.5 | length 7071
  Bottom Layer w10: GPIO1.5 1775,3980 1775,5070 1960,5255 5340,5255 5420,5175 5420,4793.06 5055,4428.06 5055,3799.03 4795.69,3539.72
RST: "STM32 F407VET6.BOOT0" ST-Link.1 | length 2238.2
  Top Layer w10: 4048.46,4352.79 4155.67,4460 5155,4460 5260,4565 5710,4565 5795.07,4650.07 5980.71,4650.07 6010,4620.78 6010,4550.07 ST-Link.1
SWCLK: "STM32 F407VET6.SWCLK" ST-Link.2 | length 1577.4
  Top Layer w10: 4448.46,4352.79 4515.67,4420 5195.98,4420 5281.97,4505.98 5954.08,4505.98 ST-Link.2
SWDIO: "STM32 F407VET6.SWDIO" ST-Link.4 | length 1714
  Top Layer w10: 4348.46,4352.79 4435.67,4440 5175,4440 5275,4540 5899.93,4540 ST-Link.4
pads on no net: "Encoder 3.6" "Encoder 3.8" "Motor 1.5" "Motor 1.6" "Motor 2.5" "Motor 2.6" "Motor 3.5" "Motor 3.6" "Motor 4.5" "Motor 4.6" "Motor 5.5" "Motor 5.6" "Motor 6.5" "Motor 6.6" "Motor 7.5" "Motor 7.6" "Motor 8.5" "Motor 8.6" "STM32 F407VET6.VDD" "STM32 F407VET6.VREF" GPIO2.4 GPIO2.5 GPIO2.6 GPIO2.7 GPIO2.8 SPI.6 SPI.7 SPI.8 SPI.9 SPI.10
copper on no net:
  other v2: 1620,820 6430,820 1620,5355 6430,5355

## Polygon pours and split planes (outlines as drawn)
GND on Top Layer "GND_L01_P000" (solid, pour order 0): 1850,5450 1525,5125 1525,1050 1850,725 6225,725 6525,1025 6525,5150 6225,5450

## Silkscreen, mask and mechanical layers (free items; w line width, h text height)
Top Overlay:
  text "GND" at 4756.06,5281.44 h35 r180
  text "PB_3" at 4932,5281.17 h35 r180
  text "PB_15" at 5117,5281.17 h35 r180
  text "PB_11" at 5296.06,5280.61 h35 r180
  text "PB_10" at 5476.06,5280.61 h35 r180
  text "GND" at 2701.06,5266.44 h35 r180
  text "PD_3" at 2896.06,5265.61 h35 r180
  text "PD_4" at 3071.06,5265.61 h35 r180
  text "PC_0" at 3241.06,5265.61 h35 r180
  text "PC_1" at 3421.06,5265.61 h35 r180
  text "GND" at 3756.06,5266.44 h35 r180
  text "PE_11" at 3951.06,5265.61 h35 r180
  text "PD_10" at 4126.06,5265.61 h35 r180
  text "PB_1" at 4296.06,5265.61 h35 r180
  text "PB_0" at 4476.06,5265.61 h35 r180
  text "5V" at 4756.06,5221.44 h35 r180
  text "PE_14" at 5296.06,5220.61 h35 r180
  text "PA_1" at 5476.06,5220.61 h35 r180
  text "5V" at 2701.06,5206.44 h35 r180
  text "PE_9" at 2896.06,5205.61 h35 r180
  text "PC_8" at 3071.06,5205.61 h35 r180
  text "PD_7" at 3241.06,5205.61 h35 r180
  text "PE_6" at 3421.06,5205.61 h35 r180
  text "5V" at 3756.06,5206.44 h35 r180
  text "PB_15" at 3951.06,5205.61 h35 r180
  text "PD_14" at 4126.06,5205.61 h35 r180
  text "PD_13" at 4296.06,5205.61 h35 r180
  text "PD_12" at 4476.06,5205.61 h35 r180
  text "PD_9" at 1738.83,5072 h35 r270
  text "PD_8" at 1793.83,5072 h35 r270
  text "5V" at 6272.9,5028.19 h35 r90
  text "5V" at 6332.9,5028.19 h35 r90
  text "3V" at 6272.9,4918.19 h35 r90
  text "3V" at 6332.9,4918.19 h35 r90
  text "PC_12" at 1738.83,4897 h35 r270
  text "GND" at 6272.9,4718.19 h35 r90
  text "PA_10" at 6327.07,4718.19 h35 r90
  text "GND" at 2533,4542 h35 r270
  text "SWDIO" at 6272.9,4518.19 h35 r90
  text "PA_9" at 6327.07,4518.19 h35 r90
  text "5V" at 1733,4437 h35 r270
  text "GND" at 1788,4437 h35 r270
  text "5V" at 2533,4422 h35 r270
  text "PC_13" at 5540.01,4401.12 h35 r90
  text "PA_10" at 2533.83,4337 h35 r270
  text "SWCLK" at 6270.25,4318.74 h35 r90
  text "RST" at 6330.25,4318.74 h35 r90
  text "5V" at 5540.84,4306.12 h35 r90
  text "GND" at 5540.84,4171.12 h35 r90
  text "PE_2" at 1738.83,4162 h35 r270
  text "PA_8" at 1793.83,4162 h35 r270
  text "PA_9" at 2533.83,4147 h35 r270
  text "PE_4" at 1738.83,3987 h35 r270
  text "PD_2" at 1793.83,3987 h35 r270
  text "PE_10" at 5541.17,3928 h35 r90
  text "GND" at 2528.36,3825.13 h35 r270
  text "PE_15" at 1738.83,3807 h35 r270
  text "PD_0" at 1793.83,3807 h35 r270
  text "GND" at 6309.51,3783.62 h35 r90
  text "PC_3" at 5541.17,3773 h35 r90
  text "5V" at 2528.36,3705.13 h35 r270
  text "PB_6" at 2529.19,3620.13 h35 r270
  text "PA_4" at 6248.68,3618.62 h35 r90
  text "PA_5" at 6308.68,3618.62 h35 r90
  text "PA_0" at 5541.17,3618 h35 r90
  text "PE_8" at 1738.83,3607 h35 r270
  text "PD_11" at 1793.83,3607 h35 r270
  text "PC_2" at 5541.17,3463 h35 r90
  text "PB_7" at 2528.83,3447 h35 r270
  text "PA_7" at 6248.68,3438.62 h35 r90
  text "PA_6" at 6308.68,3438.62 h35 r90
  text "5V" at 1733,3417 h35 r270
  text "GND" at 1788,3417 h35 r270
  text "PE_5" at 5545.01,3196.12 h35 r90
  text "5V" at 5545.84,3101.12 h35 r90
  text "GND" at 6252,3088 h35 r90
  text "5V" at 6307,3088 h35 r90
  text "PC_4" at 1753.83,3077 h35 r270
  text "PC_5" at 1813.83,3077 h35 r270
  text "GND" at 5545.84,2966.12 h35 r90
  text "PB_13" at 1753.83,2892 h35 r270
  text "PB_13" at 1813.83,2892 h35 r270
  text "PC_9" at 6246.17,2813 h35 r90
  text "PC_9" at 6306.17,2813 h35 r90
  text "PD_6" at 6246.17,2628 h35 r90
  text "PD_5" at 6306.17,2628 h35 r90
  text "5V" at 1753,2617 h35 r270
  text "GND" at 1808,2617 h35 r270
  text "PE_7" at 5541.17,2593 h35 r90
  text "5V" at 5542,2498 h35 r90
  text "GND" at 5542,2363 h35 r90
  text "PB_12" at 1753.83,2247 h35 r270
  text "PD_1" at 1813.83,2247 h35 r270
  text "GND" at 6252,2198 h35 r90
  text "5V" at 6307,2198 h35 r90
  text "PA_2" at 5541.17,2078 h35 r90
  text "PB_14" at 1753.83,2062 h35 r270
  text "PB_14" at 1813.83,2062 h35 r270
  text "PC_6" at 6246.17,1923 h35 r90
  text "PC_6" at 6306.17,1923 h35 r90
  text "PA_3" at 5541.17,1918 h35 r90
  text "5V" at 5542,1828 h35 r90
  text "5V" at 1753,1787 h35 r270
  text "GND" at 1808,1787 h35 r270
  text "PE_13" at 6246.17,1738 h35 r90
  text "PE_12" at 6306.17,1738 h35 r90
  text "GND" at 5542,1708 h35 r90
  text "CA-KRAI 15 TUGAS MAGANG" at 3260,1625 h60
  text "PA_12" at 1928,1033.83 h35
  text "PC_7" at 2113,1033.83 h35
  text "PC_11" at 2898,1033.83 h35
  text "PA_15" at 3083,1033.83 h35
  text "PE_3" at 3873,1033.83 h35
  text "PB_8" at 4048,1033.83 h35
  text "PE_1" at 4858,1028.83 h35
  text "PB_9" at 5033,1028.83 h35
  text "GND" at 2388,1028 h35
  text "GND" at 3358,1028 h35
  text "GND" at 4333,1028 h35
  text "GND" at 5318,1023 h35
  text "Vin" at 5820.24,994.83 h35
  text "GND" at 6040.24,994.83 h35
  text "PA_10" at 1928,973.83 h35
  text "PC_7" at 2113,973.83 h35
  text "PC_10" at 2898,973.83 h35
  text "PA_15" at 3083,973.83 h35
  text "PE_0" at 3873,973.83 h35
  text "PB_8" at 4048,973.83 h35
  text "5V" at 2388,973 h35
  text "5V" at 3358,973 h35
  text "5V" at 4333,973 h35
  text "PB_5" at 4858,968.83 h35
  text "PB_9" at 5033,968.83 h35
  text "5V" at 5318,968 h35

## Text inside footprints (layer, text, board x,y; h text height)
"STM32 F407VET6": Top Overlay "1" at 4675.69,3239.72 h50 r270; Top Overlay "1" at 3260.66,3139.33 h50 r270